# Altium PCB PCB_TKeyboard floor_2021-06-17.pcbdoc
Units mm, origin at the board's own origin, x right, y up, seen from the top; angles counter-clockwise.
Board outline 104.46 x 112.5 mm, 2 copper layers (Top Layer, Bottom Layer); 5 components, 1 nets, 4 pads, 0 vias.
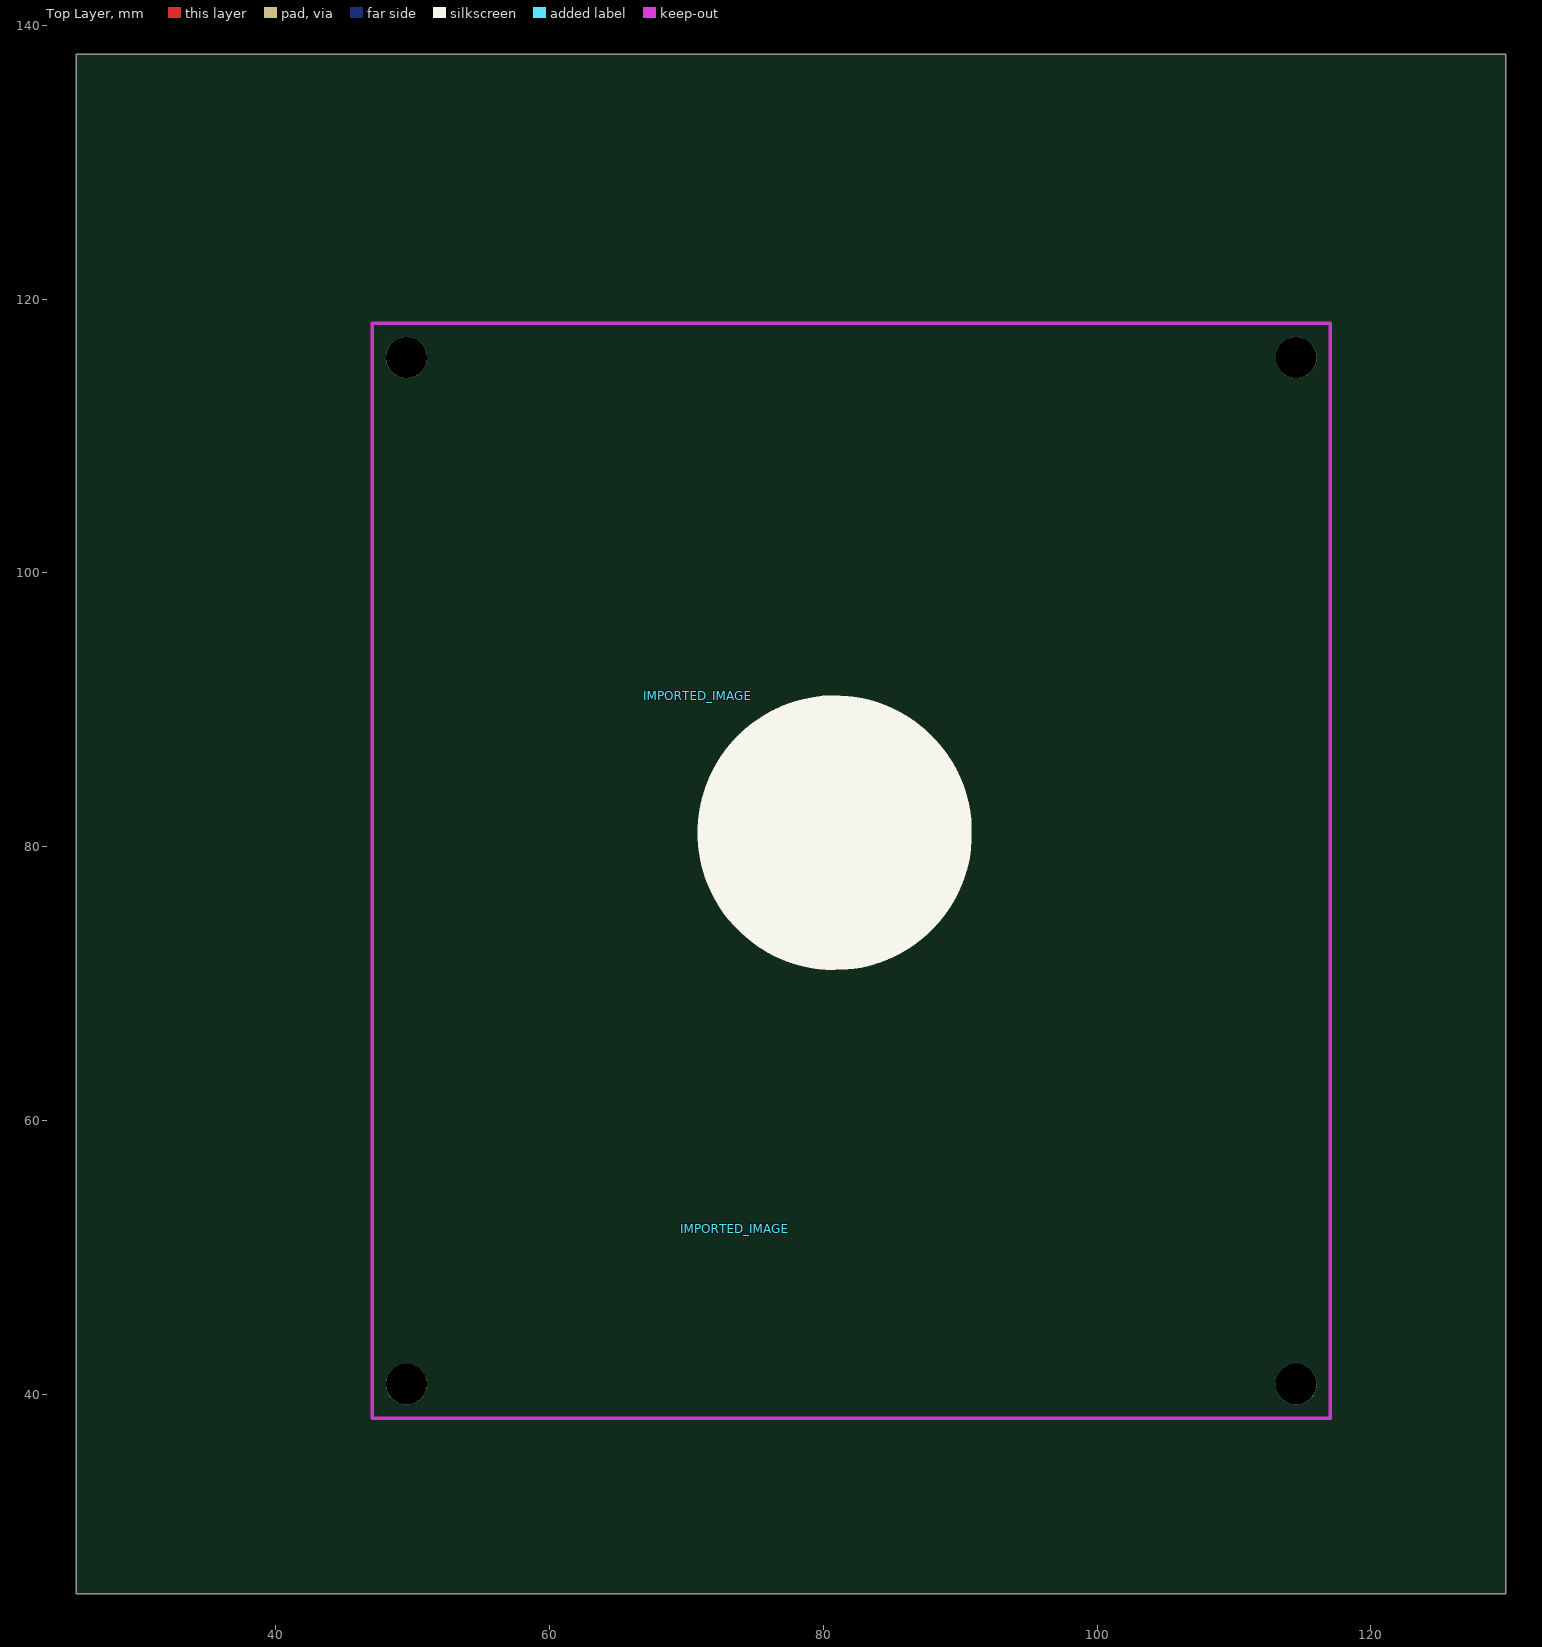
[diagram p0: Top Layer view]
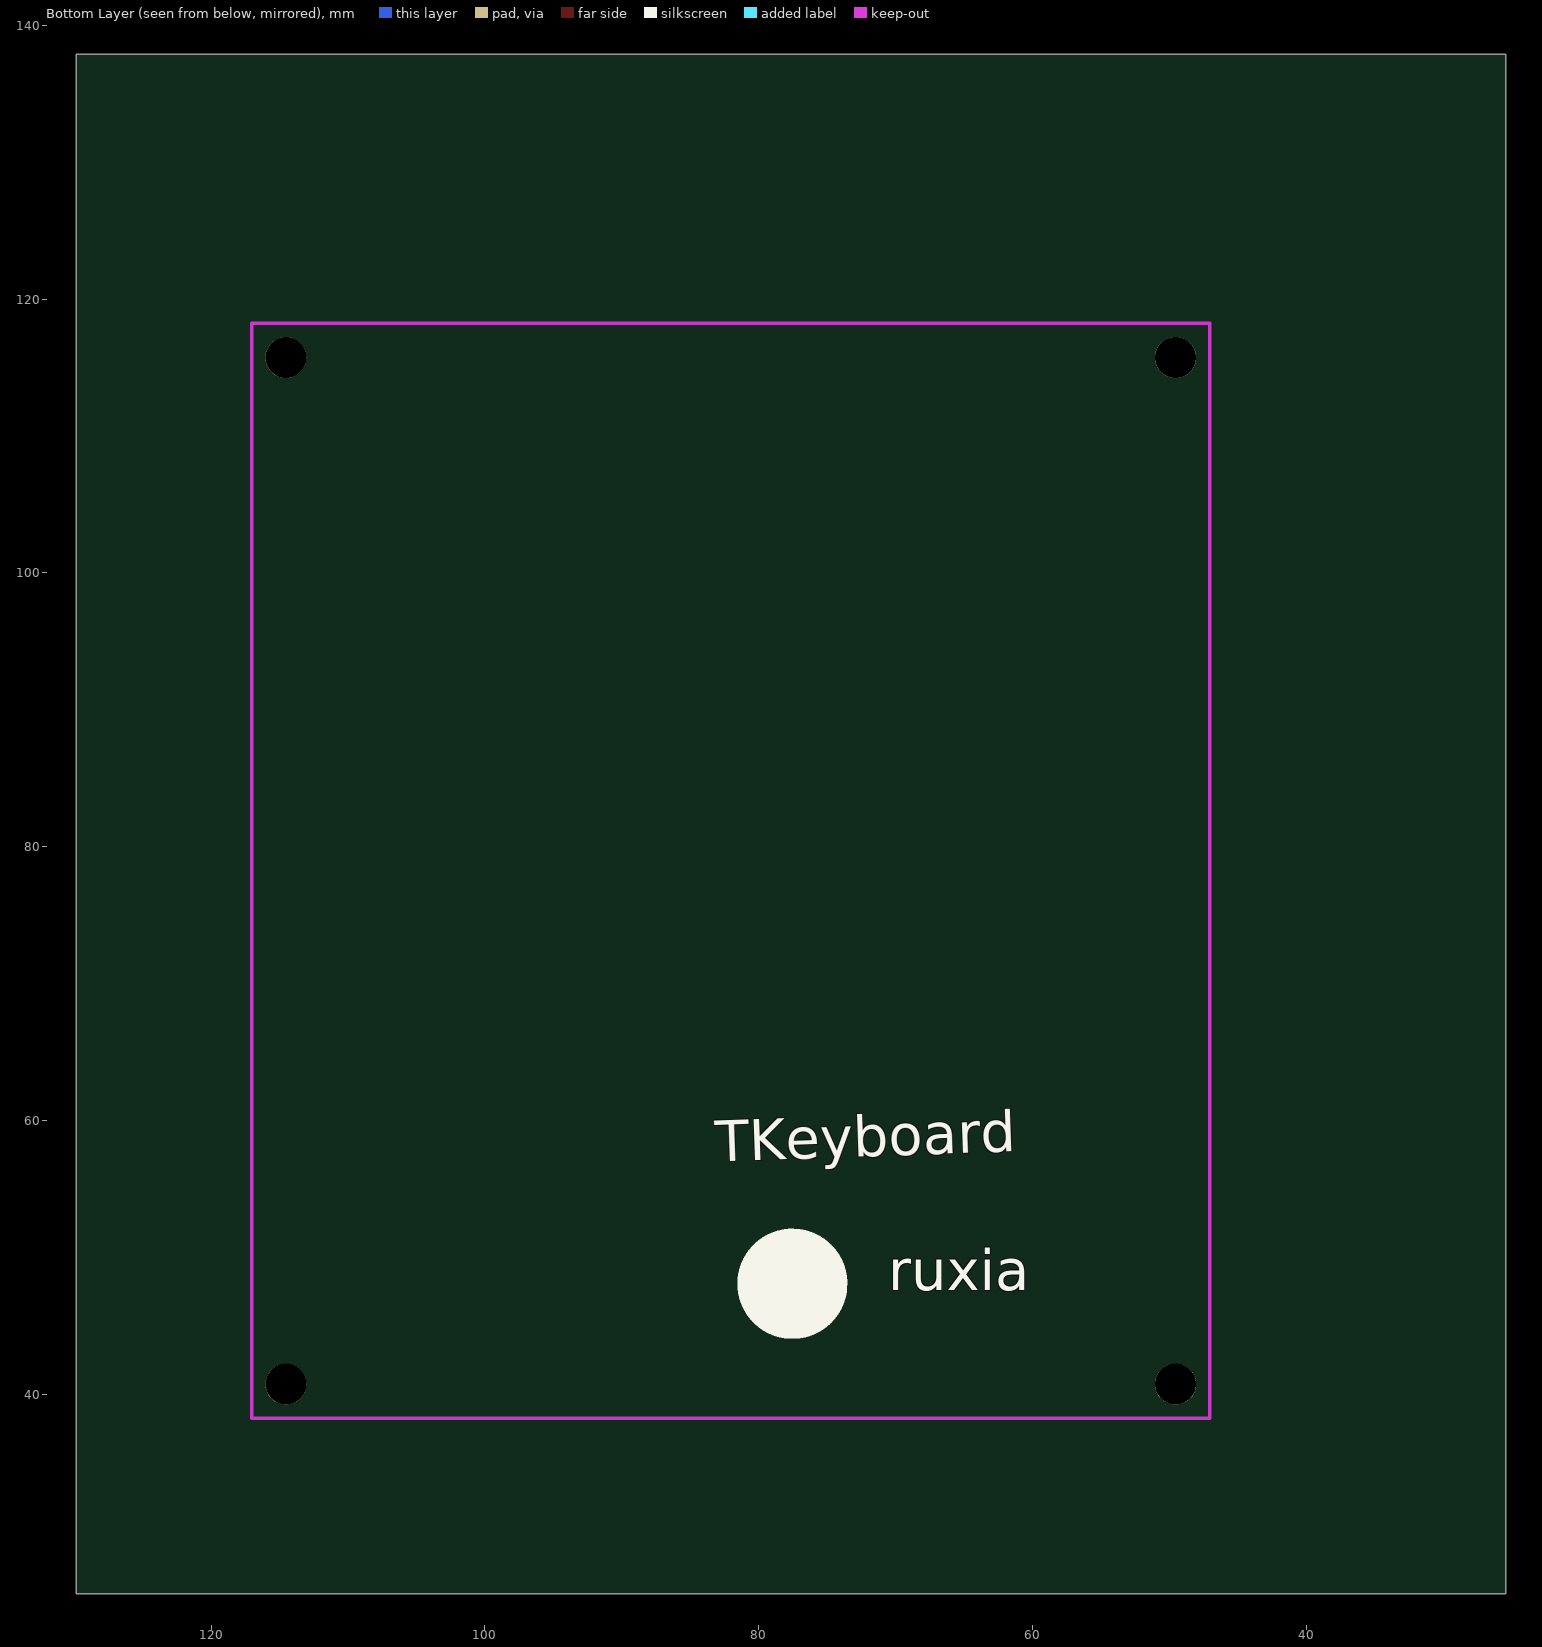
[diagram p1: Bottom Layer view, seen from below]

## Layer stack, top to bottom
Top Layer: signal copper (thickness not stored)
Dielectric: dielectric 0.32, FR-4, Dk 4.8
Bottom Layer: signal copper (thickness not stored)

## Board outline
129.864,25.4 25.4,25.4 25.4,137.903 129.864,137.903

## Components (designator, comment, footprint, x,y, rotation, side; value= is the part's Value field where it differs from the comment)
IMPORTED_IMAGE "IMPORTED_IMAGE" IMPORTED_IMAGE 70.819,91.016 r0 top
IMPORTED_IMAGE "IMPORTED_IMAGE" IMPORTED_IMAGE 73.538,52.065 r0 top
? "" ? 42.594,78.227 r0 top
? "" ? 82.037,120.758 r0 top
? "" ? 52.853,116.977 r0 top

## Footprints (in the part's own frame and the unit in brackets; to place one, negate y for a bottom-side part, rotate by r counter-clockwise, add the part's x,y. Pads: shape width x height; smd on the part's side, far side on the other; paste and mask are expansions set on the pad)
IMPORTED_IMAGE [mm]
  silkscreen extent 0,-20 20,0
? [mm]

## Free pads (board coordinates)
  round 3 hole 3 unplated: 0(49.537,40.727) 0(49.537,115.727) 0(114.537,40.727) 0(114.537,115.727)

## Nets (pads, with @x,y where several pads share a name; then routed paths per layer and width w, separated by ;. In a path a pad name is that pad's centre, name@x,y a point inside that pad or via, vN(x,y) a via of type N, cw(c..) or ccw(c..) an arc to the next point about the centre after c; other vN are vias at no path point)
0: pad.0@114.537,115.727

## Silkscreen, mask and mechanical layers (free items; w line width, h text height)
Bottom Overlay:
  text "TKeyboard" at 83.105,55.997 h5.1 r358
  text "ruxia" at 70.532,46.599 h5.1